# Altium PCB PCB Greenhouse.PcbDoc
Units mm, origin at the board's own origin, x right, y up, seen from the top; angles counter-clockwise.
Board outline 68.58 x 53.34 mm, 2 copper layers (Top Layer, Bottom Layer); 18 components, 33 nets, 77 pads, 0 vias.
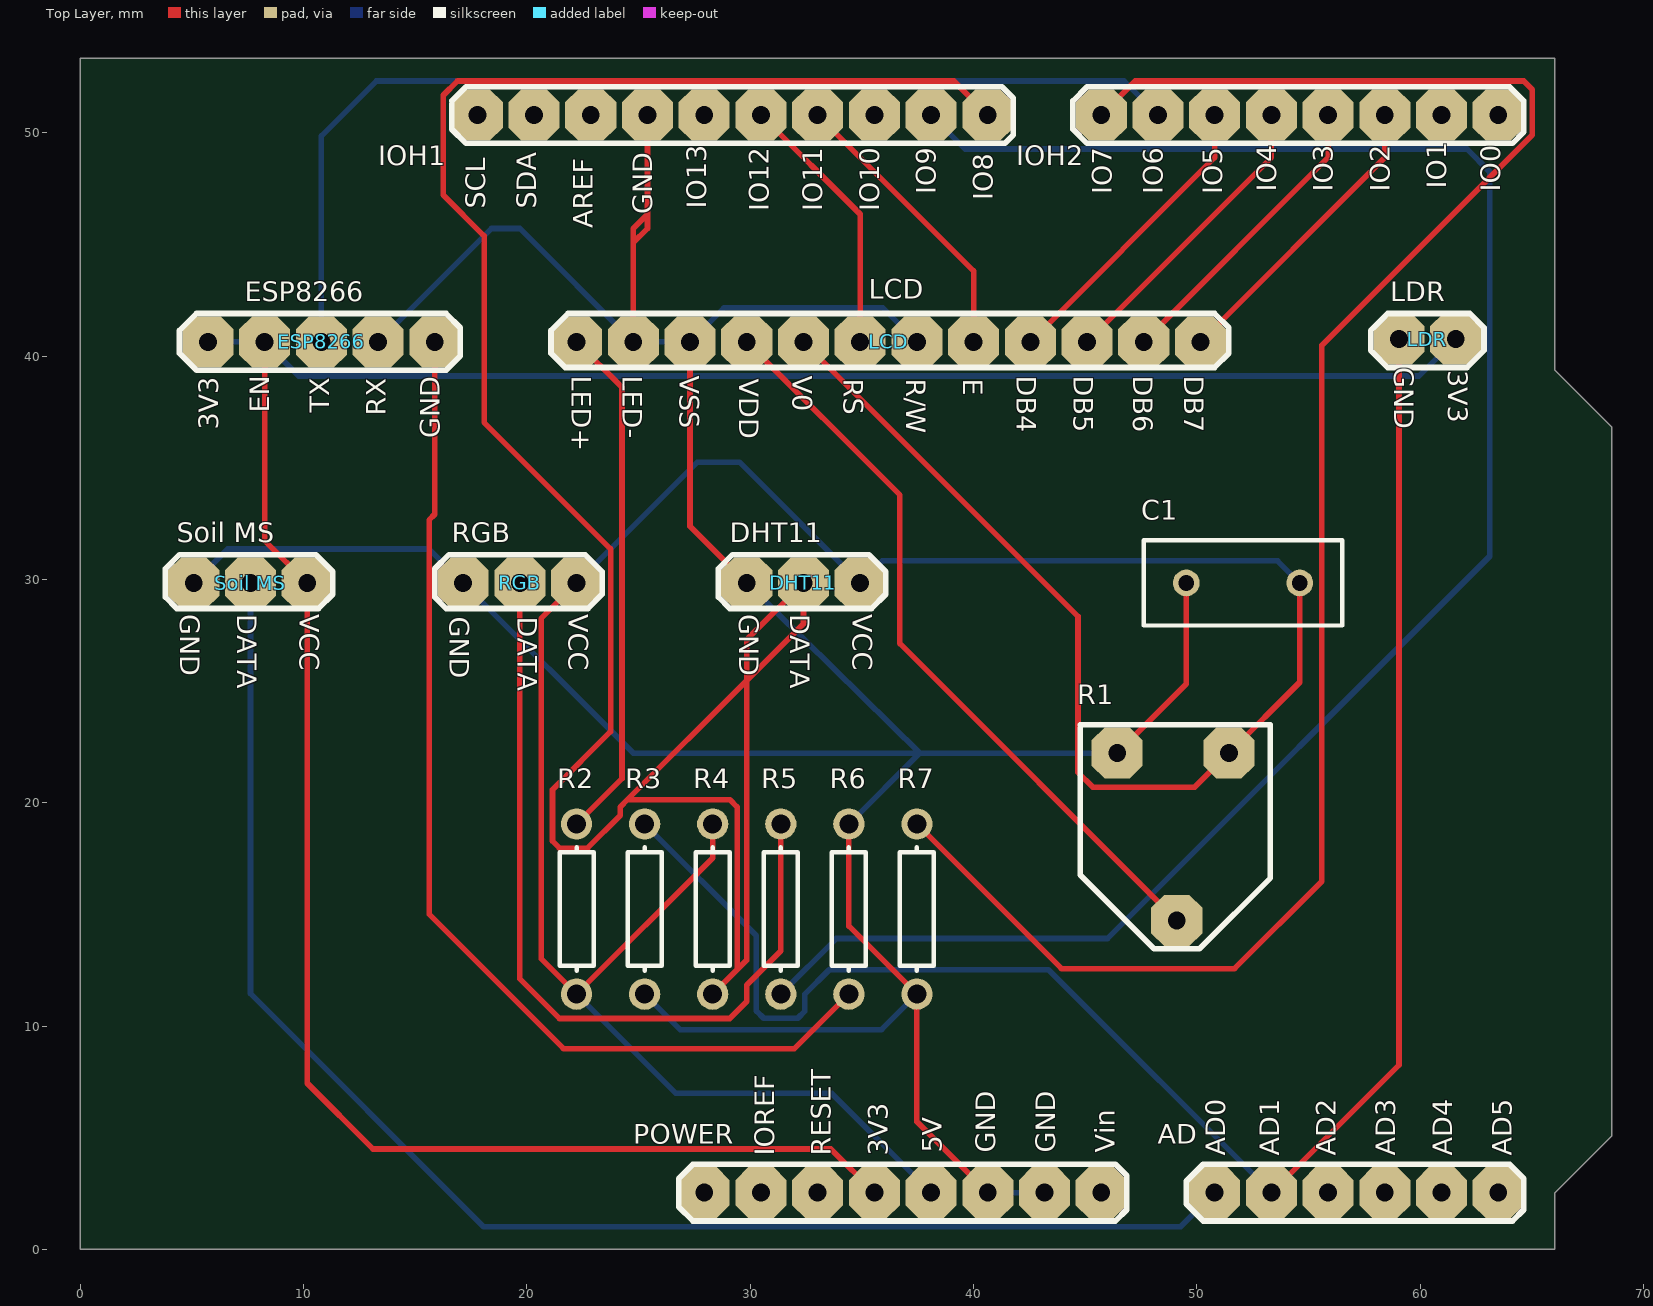
[diagram p0: Top Layer view]
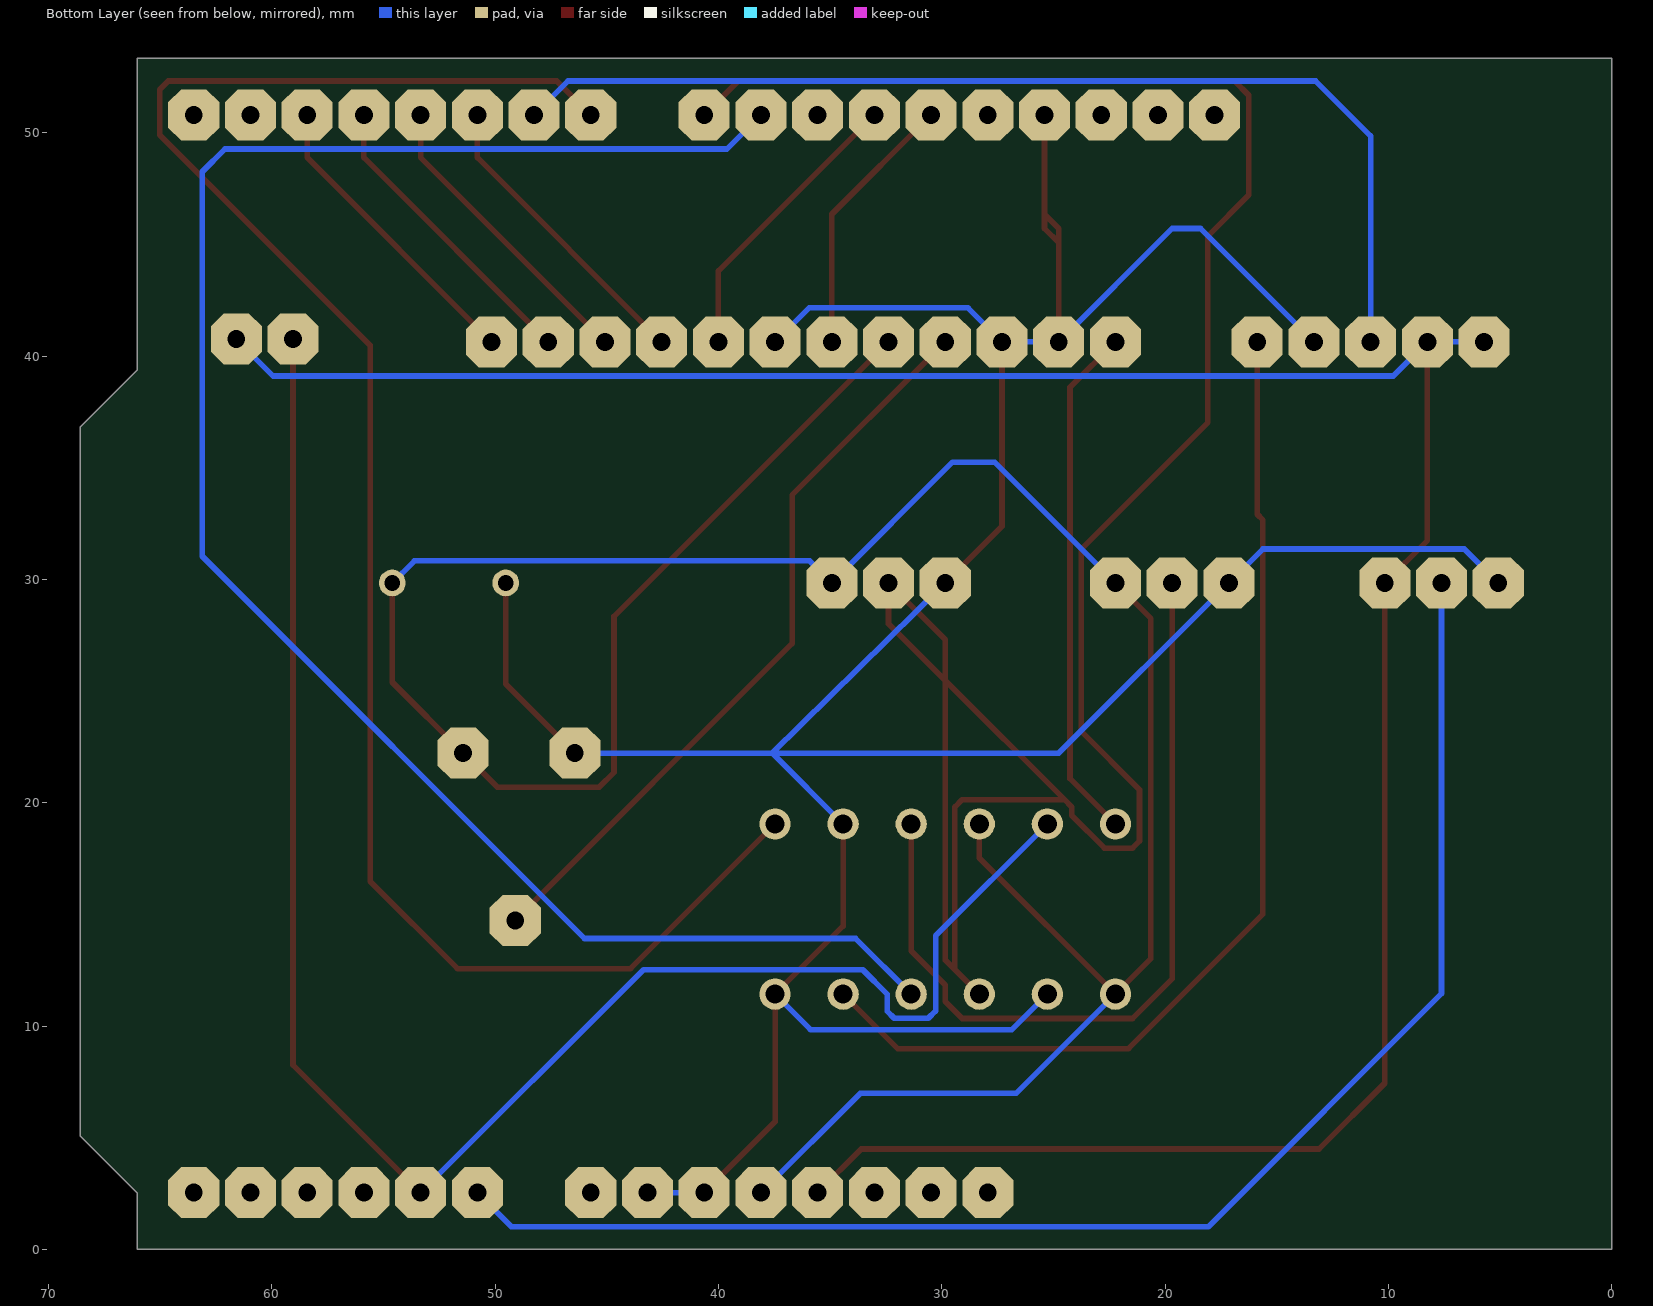
[diagram p1: Bottom Layer view, seen from below]

## Layer stack, top to bottom
Top Layer: signal copper 0.0356
Dielectric: dielectric 0.32, FR-4, Dk 4.8
Bottom Layer: signal copper 0.0356

## Board outline
0,0 0,53.34 66.04,53.34 66.04,39.37 68.58,36.83 68.58,5.08 66.04,2.54 66.04,0

## Design rules (kind name [scope] priority, off if disabled: settings)
Clearance [All] p1: gap=0.254
HoleSize [All] p1: absolutevalues=TRUE maxlimit=3.3 minlimit=0.025 maxpercent=80.000 minpercent=20.000
MinimumSolderMaskSliver [All] p1: minsoldermaskwidth=0
PolygonConnect [All] p1: connectstyle=Relief reliefconductorwidth=0.254 reliefentries=4 polygonreliefangle="90 Angle"
RoutingVias [All] p1: holewidth=0.711 width=1.27 viastyle="Through Hole" minholewidth=0.711 minwidth=1.27 maxholewidth=0.711 maxwidth=1.27
SilkToSilkClearance [All] p1: silktosilkclearance=0
SilkscreenOverComponentPads [IsPad] p1: minsilkscreentomaskgap=0
SolderMaskExpansion [All] p1: expansion=0.102
Width [All] p1: maxlimit=0.254 minlimit=0.254 preferedwidth=0.254
24 further rules are at their usual default settings.

## Components (designator, comment, footprint, x,y, rotation, side; value= is the part's Value field where it differs from the comment)
AD "Component_4" AD_Component 63.5,2.54 r90 top (schematic designator AD?)
C1 "Cap" RAD-0.2 52.07,29.845 r180 top
DHT11 "DHT11" DHT11 32.385,29.845 r0 top
ESP8266 "Component_1" ESP8266 -596.011,889.127 r90 top
IOH1 "Component_2" IOH2_Component 40.64,50.8 r90 top
IOH2 "Component_3" IOH_Component 63.5,50.8 r90 top
LCD "LCD" LCD 585.089,-759.079 r270 top
LDR "LDR" LDR 60.325,40.767 r0 top
POWER "Component_1" Power_component 45.72,2.54 r90 top (schematic designator POWER?)
R1 "RPot" 10K_POT 49.102,14.732 r0 top
R2 "Res1" AXIAL-0.3 22.225,15.24 r90 top
R3 "Res1" AXIAL-0.3 25.273,15.24 r90 top
R4 "Res1" AXIAL-0.3 28.321,15.24 r90 top
R5 "Res1" AXIAL-0.3 31.369,15.24 r90 top
R6 "Res1" AXIAL-0.3 34.417,15.24 r90 top
R7 "Res1" AXIAL-0.3 37.465,15.24 r270 top
RGB "RGB" RGB 19.685,29.845 r0 top
"Soil MS" "Soil MS" "Soil MS" 7.62,29.845 r0 top

## Footprints (in the part's own frame and the unit in brackets; to place one, negate y for a bottom-side part, rotate by r counter-clockwise, add the part's x,y. Pads: shape width x height; smd on the part's side, far side on the other; paste and mask are expansions set on the pad)
10K_POT [mil]
  oct 90x90 hole 31.5: 1(91.85,295) 2(-105,295) 3(0,0)
  silkscreen extent -170,-50 165,345
AD_Component [mil]
  oct 90x90 hole 31.5: 1(0,500) 2(0,400) 3(0,300) 4(0,200) 5(0,100) 6(0,0)
  silkscreen extent -50,-45 50,550
AXIAL-0.3 [mm] "Axial Device, Thru-Hole; 2 Leads; 0.3 in Pin Spacing"
  round 1.4 hole 0.85: 1(-3.81,0) 2(3.81,0)
  silkscreen extent -2.77,-0.76 2.77,0.76
DHT11 [mil]
  oct 90x90 hole 31.5: 1(-100,0) 2(0,0) 3(100,0)
  silkscreen extent -150,-45 145,50
ESP8266 [mil]
  oct 90x90 hole 31.5: 1(-33405,-23690) 2(-33405,-23790) 3(-33405,-23890) 4(-33405,-23990) 5(-33405,-24090)
  silkscreen extent -33455,-24135 -33355,-23640
IOH2_Component [mil]
  oct 90x90 hole 31.5: 1(0,0) 2(0,100) 3(0,200) 4(0,300) 5(0,400) 6(0,500) 7(0,600) 8(0,700) 9(0,800) 10(0,900)
  silkscreen extent -50,-45 50,945
IOH_Component [mil]
  oct 90x90 hole 31.5: 1(0,0) 2(0,100) 3(0,200) 4(0,300) 5(0,400) 6(0,500) 7(0,600) 8(0,700)
  silkscreen extent -50,-45 50,750
LCD [mil]
  oct 90x90 hole 31.5: 1(-31485,-22160) 2(-31485,-22060) 3(-31485,-21960) 4(-31485,-21860) 5(-31485,-21760) 6(-31485,-21660) 7(-31485,-21560) 8(-31485,-21460) 13(-31485,-21360) 14(-31485,-21260) 15(-31485,-21160) 16(-31485,-21060)
  silkscreen extent -31535,-22205 -31440,-21010
LDR [mil]
  oct 90x90 hole 31.5: 1(-50,0) 2(50,0)
  silkscreen extent -100,-50 100,45
Power_component [mil]
  oct 90x90 hole 31.5: 1(0,0) 2(0,100) 3(0,200) 4(0,300) 5(0,400) 6(0,500) 7(0,600) 8(0,700)
  silkscreen extent -50,-45 50,745
RAD-0.2 [mm] "Radial Cap, Thru-Hole; 2 Leads; 0.2 in Pin Spacing"
  round 1.2 hole 0.7: 1(-2.54,0) 2(2.54,0)
  silkscreen extent -4.44,-1.91 4.44,1.91
RGB [mil]
  oct 90x90 hole 31.5: 1(-100,0) 2(0,0) 3(100,0)
  silkscreen extent -150,-45 145,50
"Soil MS" [mil]
  oct 90x90 hole 31.5: 1(-100,0) 2(0,0) 3(100,0)
  silkscreen extent -150,-45 145,50

## Part data
AD IOH1 IOH2: library part Component_1
C1: "Capacitor"
R1: "Potentiometer"
R2 R3 R4 R5 R6 R7: "Resistor"

## Nets (pads, with @x,y where several pads share a name; then routed paths per layer and width w, separated by ;. In a path a pad name is that pad's centre, name@x,y a point inside that pad or via, vN(x,y) a via of type N, cw(c..) or ccw(c..) an arc to the next point about the centre after c; other vN are vias at no path point)
3V3: "Soil MS.3" ESP8266.1 ESP8266.2 LDR.2 POWER.5 | length 118.6
  Top Layer w0.254: ESP8266.2 8.255,31.75 10.16,29.845 10.16,7.442 13.106,4.496 33.604,4.496 POWER.5
  Bottom Layer w0.254: ESP8266.1 ESP8266.2 9.779,39.116 59.944,39.116 LDR.2
5V: C1.1 DHT11.3 LCD.5 POWER.4 R1.1 R2.1 R4.2 RGB.3 | length 128.1
  Top Layer w0.254: RGB.3 20.636,28.256 20.636,13.019 R2.1 28.321,17.526 R4.2 ; LCD.5 44.679,28.346 44.679,21.361 45.339,20.701 49.911,20.701 R1.1 54.61,25.4 C1.1
  Bottom Layer w0.254: R2.1 26.67,6.985 33.655,6.985 POWER.4 ; RGB.3 27.635,35.255 29.515,35.255 DHT11.3 35.916,30.836 53.619,30.836 C1.1
AD0: "Soil MS.2" AD.1 | length 66.5
  Bottom Layer w0.254: 7.62,29.845 7.62,11.455 18.059,1.016 49.276,1.016 AD.1
AD1: AD.2 LDR.1 R3.2 | length 79.7
  Top Layer w0.254: AD.2 59.055,8.255 LDR.1
  Bottom Layer w0.254: R3.2 30.277,14.046 30.277,10.679 30.607,10.349 32.131,10.349 32.45,10.668 32.45,11.43 33.542,12.522 43.358,12.522 AD.2
AD2: AD.3
AD3: AD.4
AD4: AD.5
AD5: AD.6
AREF: IOH1.8
GND: "Soil MS.1" C1.2 DHT11.1 ESP8266.4 IOH1.7 LCD.2 LCD.3 LCD.7 POWER.2 POWER.3 R1.2 R3.1 R6.2 R7.2 RGB.1 | length 158.6
  Top Layer w0.254: LCD.2 24.765,45.085 ; IOH1.7 25.4,46.355 ; LCD.3 27.305,32.385 DHT11.1 ; R6.2 34.417,14.478 R7.2 37.465,5.715 POWER.3 ; R1.2 49.53,25.32 C1.2 ; 24.765,45.085 25.4,45.72 25.4,46.355 ; 24.765,45.085 24.765,45.72 25.4,46.355
  Bottom Layer w0.254: 5.08,29.845 6.604,31.369 15.621,31.369 RGB.1 24.765,22.225 37.592,22.225 ; ESP8266.4 18.415,45.72 19.685,45.72 LCD.2 LCD.3 28.829,42.164 35.941,42.164 LCD.7 ; R3.1 26.862,9.841 35.876,9.841 R7.2 ; DHT11.1 37.592,22.225 ; R6.2 37.592,22.225 ; POWER.3 POWER.2 ; R1.2 37.592,22.225
JO0: IOH2.1
JO1: IOH2.2
JO2: IOH2.3 LCD.16 | length 13.6
  Top Layer w0.254: LCD.16 58.42,48.895 IOH2.3
JO3: IOH2.4 LCD.15 | length 13.6
  Top Layer w0.254: LCD.15 55.88,48.895 IOH2.4
JO4: IOH2.5 LCD.14 | length 13.6
  Top Layer w0.254: LCD.14 53.34,48.895 IOH2.5
JO5: IOH2.6 LCD.13 | length 13.6
  Top Layer w0.254: LCD.13 50.8,48.895 IOH2.6
JO6: ESP8266.3 IOH2.7 | length 48.3
  Bottom Layer w0.254: ESP8266.3 10.795,49.86 13.259,52.324 46.736,52.324 IOH2.7
JO7: IOH2.8 R7.1 | length 81.9
  Top Layer w0.254: R7.1 43.942,12.573 51.689,12.573 55.601,16.485 55.601,40.488 65.024,49.911 65.024,51.943 64.643,52.324 47.244,52.324 IOH2.8
JO8: DHT11.2 IOH1.1 R4.1 | length 112.9
  Top Layer w0.254: R4.1 29.413,12.522 ; IOH1.1 39.116,52.324 16.891,52.324 16.256,51.689 16.256,47.219 18.085,45.39 18.085,37.033 23.749,31.369 23.749,23.19 21.144,20.585 21.144,18.288 21.463,17.969 22.719,17.969 24.181,19.431 24.181,19.812 24.511,20.142 ; 24.511,20.142 29.083,20.142 29.413,19.812 29.413,12.522 ; 24.511,20.142 29.845,25.476 ; 29.413,12.522 29.845,12.954 29.845,25.476 ; 29.845,25.476 29.845,27.305 DHT11.2 32.385,28.016 29.845,25.476
JO9: IOH1.2 R5.1 | length 83.2
  Bottom Layer w0.254: R5.1 33.858,13.919 45.999,13.919 63.119,31.039 63.119,48.26 62.103,49.276 39.624,49.276 IOH1.2
JO10: IOH1.3
JO11: IOH1.4 LCD.8 | length 13.1
  Top Layer w0.254: IOH1.4 40.005,43.815 LCD.8
JO12: IOH1.5 LCD.6 | length 12
  Top Layer w0.254: IOH1.5 34.925,46.355 LCD.6
JO13: IOH1.6
JOREF: POWER.7
NetESP8266_5: ESP8266.5 R6.1 | length 48
  Top Layer w0.254: ESP8266.5 15.875,32.918 15.621,32.664 15.621,15.012 21.641,8.992 31.979,8.992 R6.1
NetLCD_1: LCD.1 R2.2 | length 23.3
  Top Layer w0.254: R2.2 24.257,21.082 24.257,38.608 LCD.1
NetLCD_4: LCD.4 R1.3 | length 33.9
  Top Layer w0.254: LCD.4 36.703,33.782 36.703,27.131 R1.3
NetR5_2: R5.2 RGB.2 | length 37.5
  Top Layer w0.254: RGB.2 19.685,12.116 21.463,10.338 29.083,10.338 29.845,11.1 29.845,11.836 31.369,13.36 R5.2
RESET: POWER.6
SCL: IOH1.10
SDA: IOH1.9
VIN: POWER.1
pads on no net: POWER.8

## Silkscreen, mask and mechanical layers (free items; w line width, h text height)
Mechanical 1:
  the board outline again, w0.254

## Text inside footprints (layer, text, board x,y; h text height)
AD: Top Overlay "AD5" at 64.389,4.191 h1.52 r90; Top Overlay "AD4" at 61.722,4.191 h1.52 r90; Top Overlay "AD3" at 59.182,4.191 h1.52 r90; Top Overlay "AD2" at 56.515,4.191 h1.52 r90; Top Overlay "AD1" at 53.975,4.191 h1.52 r90; Top Overlay "AD0" at 51.562,4.191 h1.52 r90
DHT11: Top Overlay "GND" at 29.21,28.448 h1.52 r270; Top Overlay "DATA" at 31.496,28.448 h1.52 r270; Top Overlay "VCC" at 34.29,28.448 h1.52 r270
ESP8266: Top Overlay "GND" at 16.383,36.322 h1.52 r90; Top Overlay "RX" at 13.97,37.338 h1.52 r90; Top Overlay "TX" at 11.43,37.465 h1.52 r90; Top Overlay "EN" at 8.763,37.465 h1.52 r90; Top Overlay "3V3" at 6.477,36.703 h1.52 r90
IOH1: Top Overlay "SCL" at 18.415,46.609 h1.52 r90; Top Overlay "SDA" at 20.701,46.609 h1.52 r90; Top Overlay "AREF" at 23.241,45.72 h1.52 r90; Top Overlay "GND" at 25.908,46.355 h1.52 r90; Top Overlay "IO13" at 28.321,46.609 h1.52 r90; Top Overlay "IO12" at 31.115,46.482 h1.52 r90; Top Overlay "IO11" at 33.528,46.482 h1.52 r90; Top Overlay "IO10" at 36.068,46.482 h1.52 r90; Top Overlay "IO9" at 38.608,47.244 h1.52 r90; Top Overlay "IO8" at 41.148,46.99 h1.52 r90
IOH2: Top Overlay "IO7" at 46.482,47.244 h1.52 r90; Top Overlay "IO6" at 48.768,47.244 h1.52 r90; Top Overlay "IO5" at 51.435,47.244 h1.52 r90; Top Overlay "IO4" at 53.848,47.371 h1.52 r90; Top Overlay "IO3" at 56.388,47.371 h1.52 r90; Top Overlay "IO2" at 58.928,47.371 h1.52 r90; Top Overlay "IO1" at 61.468,47.498 h1.52 r90; Top Overlay "IO0" at 63.881,47.371 h1.52 r90
LCD: Top Overlay "DB7" at 49.149,39.116 h1.52 r270; Top Overlay "DB6" at 46.863,39.116 h1.52 r270; Top Overlay "DB5" at 44.196,39.116 h1.52 r270; Top Overlay "DB4" at 41.656,39.116 h1.52 r270; Top Overlay "E" at 39.243,38.989 h1.52 r270; Top Overlay "R/W" at 36.703,38.989 h1.52 r270; Top Overlay "RS" at 33.909,38.989 h1.52 r270; Top Overlay "V0" at 31.623,39.116 h1.52 r270; Top Overlay "VDD" at 29.21,38.989 h1.52 r270; Top Overlay "VSS" at 26.543,39.116 h1.52 r270; Top Overlay "LED+" at 21.717,39.116 h1.52 r270; Top Overlay "LED-" at 24.003,39.116 h1.52 r270
LDR: Top Overlay "GND" at 58.547,39.497 h1.52 r270; Top Overlay "3V3" at 60.96,39.37 h1.52 r270
POWER: Top Overlay "IOREF" at 31.369,4.191 h1.52 r90; Top Overlay "RESET" at 33.909,4.191 h1.52 r90; Top Overlay "3V3" at 36.449,4.191 h1.52 r90; Top Overlay "5V" at 38.862,4.318 h1.52 r90; Top Overlay "GND" at 41.275,4.318 h1.52 r90; Top Overlay "GND" at 43.942,4.318 h1.52 r90; Top Overlay "Vin" at 46.609,4.318 h1.52 r90
RGB: Top Overlay "GND" at 16.256,28.321 h1.52 r270; Top Overlay "DATA" at 19.304,28.321 h1.52 r270; Top Overlay "VCC" at 21.59,28.448 h1.52 r270
"Soil MS": Top Overlay "VCC" at 9.525,28.448 h1.52 r270; Top Overlay "DATA" at 6.731,28.448 h1.52 r270; Top Overlay "GND" at 4.191,28.448 h1.52 r270